# Altium PCB 19-3170105582.PcbDoc (part 2 of 2)
Units mil, origin at the board's own origin, x right, y up, seen from the top; angles counter-clockwise.
Board outline 8600 x 7000 mil, 2 copper layers (Top Layer, Bottom Layer); 186 components, 221 nets, 859 pads, 233 vias.
Unrouted connection lines stored in the file: 26.
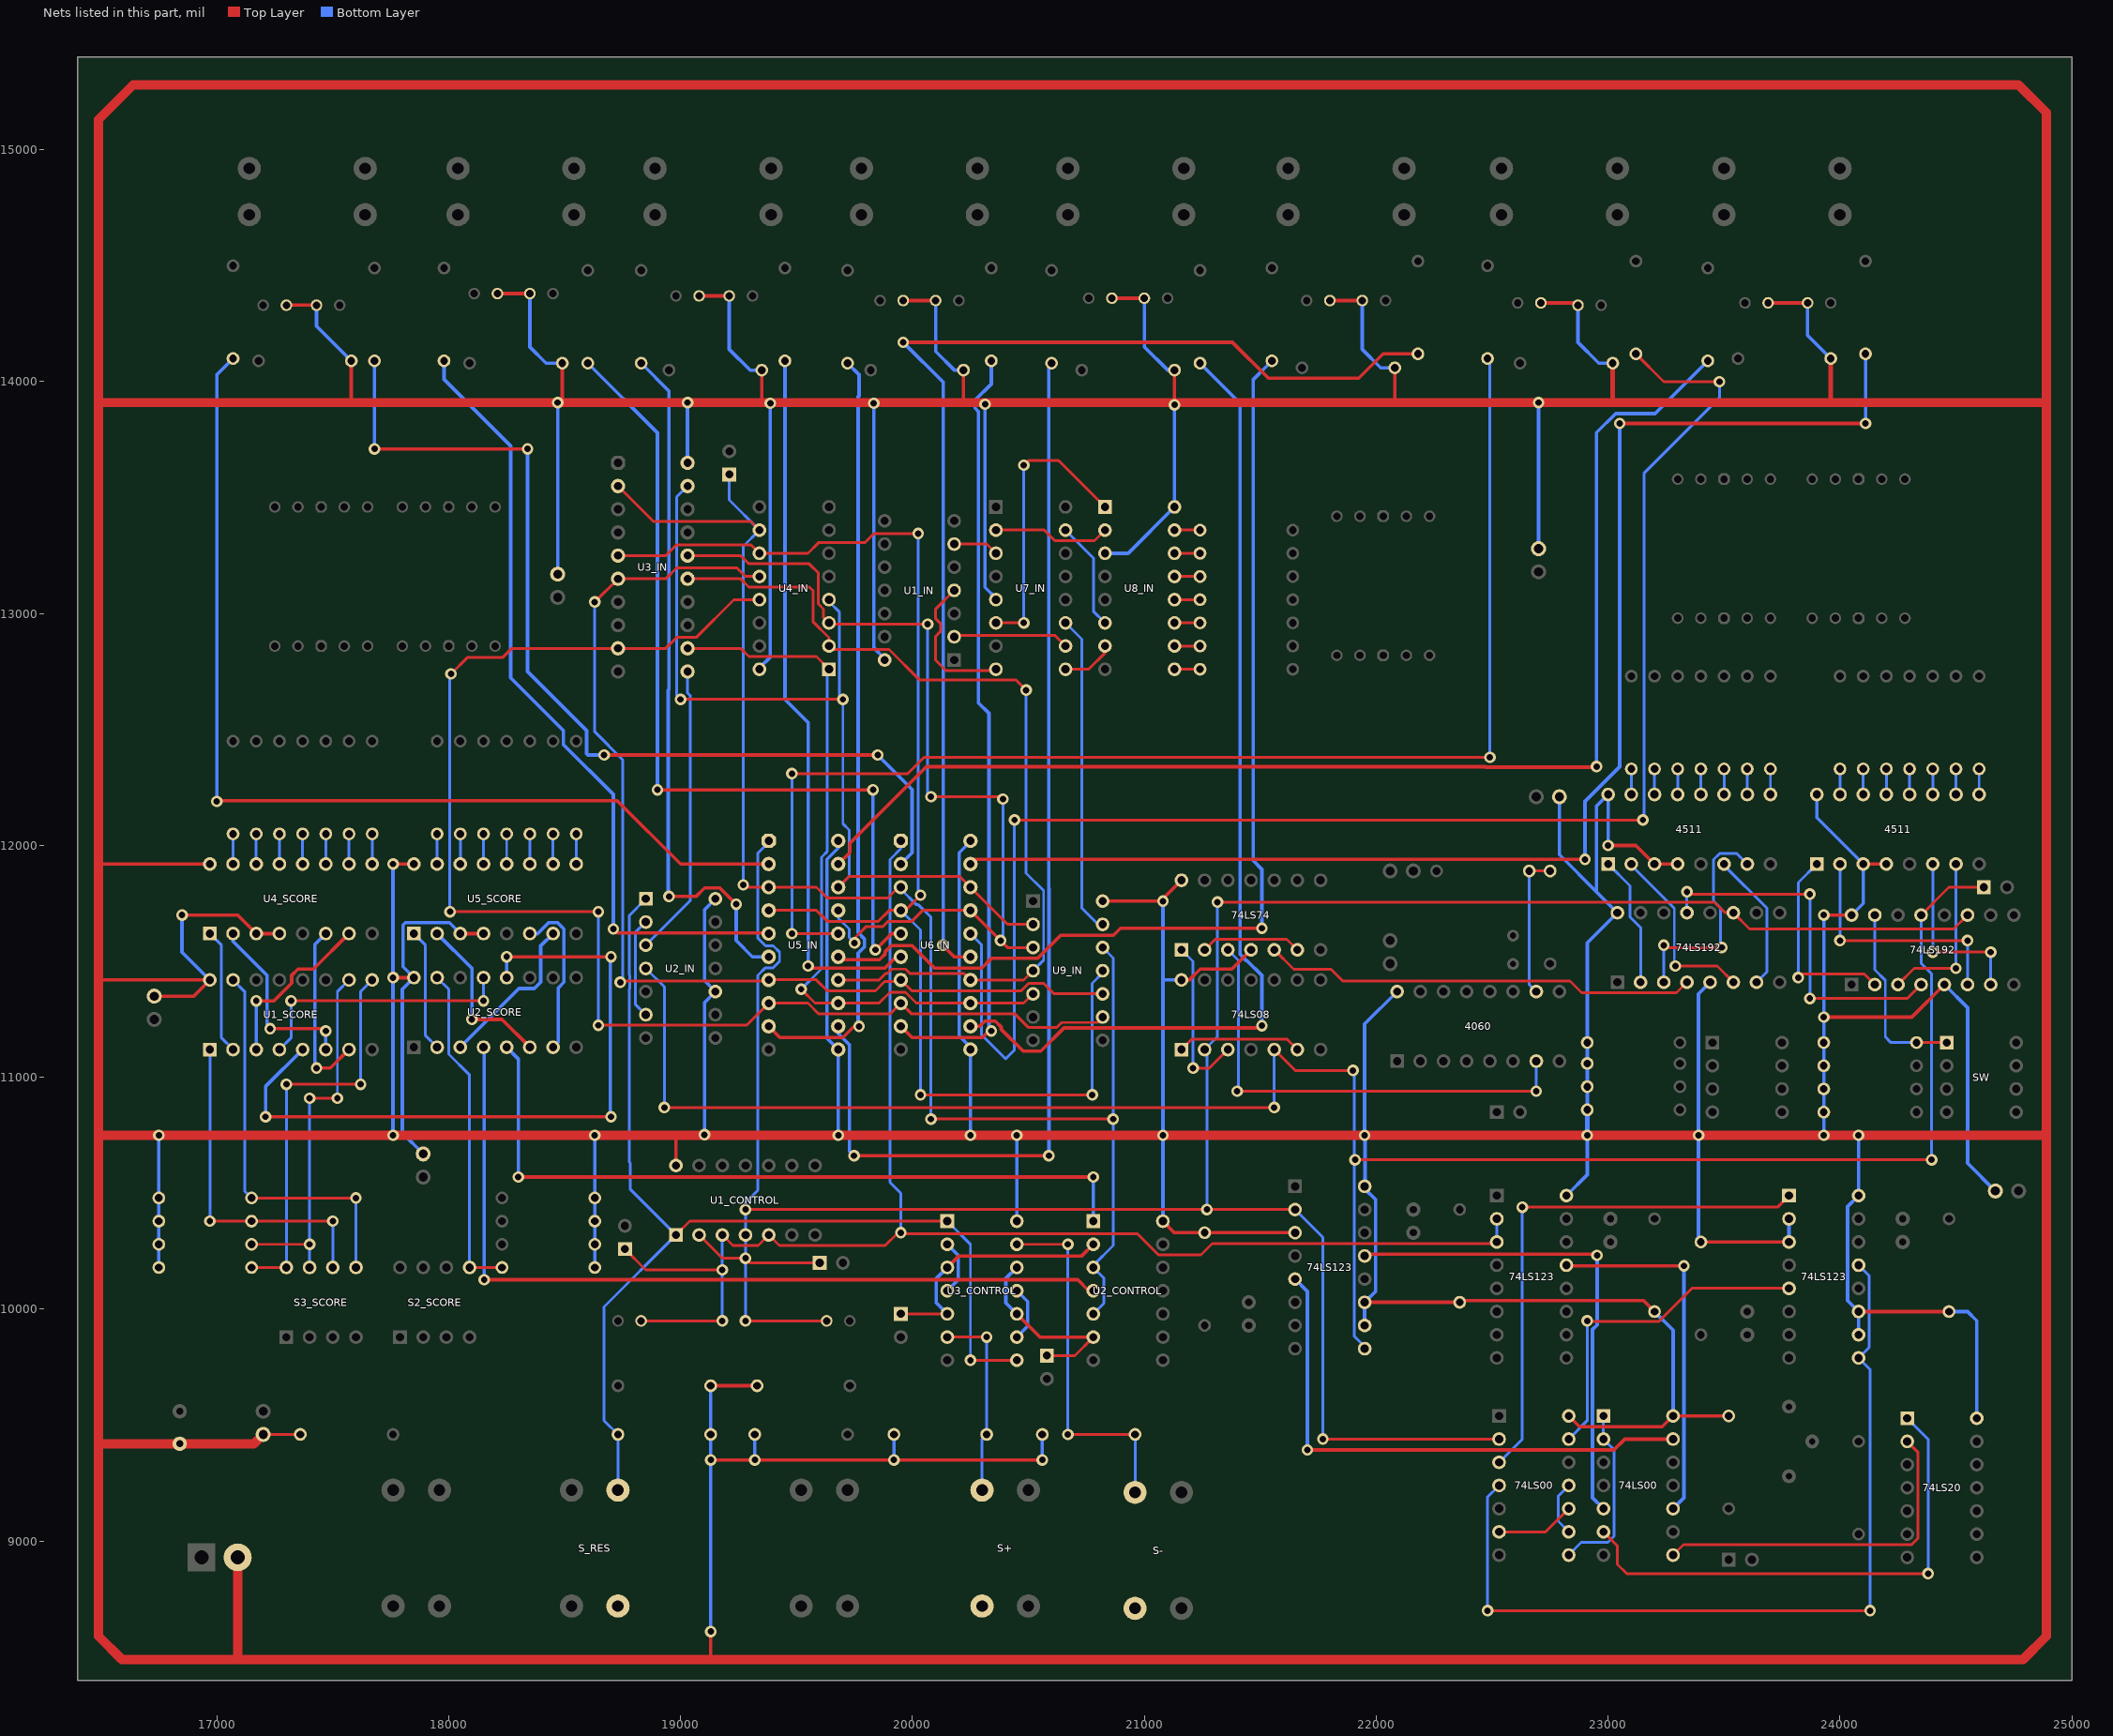
[diagram p2: the nets of this part, all layers, seen from the top]

## Via types
v1: diameter 50, hole 28, Top Layer to Bottom Layer, 233 vias

## Nets (pads, with @x,y where several pads share a name; then routed paths per layer and width w, separated by ;. In a path a pad name is that pad's centre, name@x,y a point inside that pad or via, vN(x,y) a via of type N, cw(c..) or ccw(c..) an arc to the next point about the centre after c; other vN are vias at no path point) (continued)
NetR8_SCORE_1: R8_SCORE.1 S2_SCORE.5 U2_SCORE.15 | length 1448
  Top Layer w12: S2_SCORE.5@18090,10180 R8_SCORE.1@18230,10180
  Bottom Layer w12: U2_SCORE.15@17950,11430 18000,11380 18000,11100 18090,11010 S2_SCORE.5@18090,10180
NetR8_TIME_1: 5.1K.1@24330,11150 74LS192.15@24150,11700 SW.1@24460,11150 | length 819
  Top Layer w12: 5.1K.1@24330,11150 SW.1@24460,11150
  Bottom Layer w12: 74LS192.15@24150,11700 24150,11464.39 24195.53,11418.86 24195.53,11284.47 24195.53,11174.47 24220,11150 5.1K.1@24330,11150
NetR9_IN_1: R9_IN.1 U8_IN.13 | length 110
  Top Layer w12: U8_IN.13@21130,13160 R9_IN.1@21240,13160
NetR9_SCORE_1: R9_SCORE.1 S3_SCORE.8 U1_SCORE.9 | length 1730.7
  Top Layer w12: R9_SCORE.1@17150,10180 S3_SCORE.8@17300,10180 ; v1(17300,10970) v1(17620,10970)
  Bottom Layer w12: S3_SCORE.8@17300,10180 v1(17300,10970) ; v1(17620,10970) 17620,11370 U1_SCORE.9@17670,11420
NetR9_TIME_1: 4511.13@24200,12220 R9_TIME.1 | length 110
  Bottom Layer w12: 4511.13@24200,12220 R9_TIME.1@24200,12330
NetR10_IN_1: R10_IN.1 U8_IN.12 | length 110
  Top Layer w12: U8_IN.12@21130,13060 R10_IN.1@21240,13060
NetR10_SCORE_1: R10_SCORE.1 S3_SCORE.7 U1_SCORE.10 | length 1630.7
  Top Layer w12: R10_SCORE.1@17150,10280 v1(17400,10280) ; v1(17400,10910) v1(17520,10910)
  Bottom Layer w12: S3_SCORE.7@17400,10180 v1(17400,10280) v1(17400,10910) ; v1(17520,10910) 17520,11370 U1_SCORE.10@17570,11420
NetR10_TIME_1: 4511.12@24300,12220 R10_TIME.1 | length 110
  Bottom Layer w12: 4511.12@24300,12220 R10_TIME.1@24300,12330
NetR11_IN_1: R11_IN.1 U8_IN.11 | length 110
  Top Layer w12: U8_IN.11@21130,12960 R11_IN.1@21240,12960
NetR11_SCORE_1: R11_SCORE.1 S3_SCORE.6 U1_SCORE.1 | length 1470
  Top Layer w12: v1(16970,10380) R11_SCORE.1@17150,10380 v1(17500,10380)
  Bottom Layer w12: v1(16970,10380) U1_SCORE.1@16970,11120 ; S3_SCORE.6@17500,10180 v1(17500,10380)
NetR11_TIME_1: 4511.11@24400,12220 R11_TIME.1 | length 110
  Bottom Layer w12: 4511.11@24400,12220 R11_TIME.1@24400,12330
NetR12_IN_1: R12_IN.1 U8_IN.10 | length 110
  Top Layer w12: U8_IN.10@21130,12860 R12_IN.1@21240,12860
NetR12_SCORE_1: 5.1k.1@17150,10480 S3_SCORE.5 U1_SCORE.15 | length 1723.1
  Top Layer w12: 5.1k.1@17150,10480 v1(17600,10480)
  Bottom Layer w12: U1_SCORE.15@17070,11420 17120,11370 17120,10510 5.1k.1@17150,10480 ; S3_SCORE.5@17600,10180 v1(17600,10480)
NetR12_TIME_1: 4511.10@24500,12220 R12_TIME.1 | length 110
  Bottom Layer w12: 4511.10@24500,12220 R12_TIME.1@24500,12330
NetR13_IN_1: R13_IN.1 U8_IN.9 | length 110
  Top Layer w12: U8_IN.9@21130,12760 R13_IN.1@21240,12760
NetR13_SCORE_1: R13_SCORE.1 U4_SCORE.13 | length 130
  Bottom Layer w12: U4_SCORE.13@17270,11920 R13_SCORE.1@17270,12050
NetR13_TIME_1: 4511.9@24600,12220 R13_TIME.1 | length 110
  Bottom Layer w12: 4511.9@24600,12220 R13_TIME.1@24600,12330
NetR14_IN_1: 1k.1@21240,13360 U8_IN.15 | length 110
  Top Layer w12: U8_IN.15@21130,13360 1k.1@21240,13360
NetR14_SCORE_1: R14_SCORE.1 U4_SCORE.12 | length 130
  Bottom Layer w12: U4_SCORE.12@17370,11920 R14_SCORE.1@17370,12050
NetR14_TIME_1: 1K.1@24000,12330 4511.15@24000,12220 | length 110
  Bottom Layer w12: 4511.15@24000,12220 1K.1@24000,12330
NetR15_IN_1: R15_IN.1 U8_IN.14 | length 110
  Top Layer w12: U8_IN.14@21130,13260 R15_IN.1@21240,13260
NetR15_SCORE_1: R15_SCORE.1 U4_SCORE.11 | length 130
  Bottom Layer w12: U4_SCORE.11@17470,11920 R15_SCORE.1@17470,12050
NetR15_TIME_1: 4511.14@24100,12220 R15_TIME.1 | length 110
  Bottom Layer w12: 4511.14@24100,12220 R15_TIME.1@24100,12330
NetR16_IN_1: 510.1@17070,14100 U5_IN.2 | length 4432.9
  Top Layer w15: v1(17000,12190) 17002.5,12192.5 18727.5,12192.5 19000,11920 U5_IN.2@19380,11920
  Bottom Layer w15: v1(17000,12190) 17000,14030 510.1@17070,14100
NetR16_SCORE_1: R16_SCORE.1 U4_SCORE.10 | length 130
  Bottom Layer w12: U4_SCORE.10@17570,11920 R16_SCORE.1@17570,12050
NetR16_TIME_1: 4511.13@23300,12220 R16_TIME.1 | length 110
  Bottom Layer w12: 4511.13@23300,12220 R16_TIME.1@23300,12330
NetR17_IN_1: R17_IN.1 U5_IN.5 | length 3430.7
  Top Layer w15: v1(18710,11640) 18727.03,11622.97 19377.03,11622.97 U5_IN.5@19380,11620
  Bottom Layer w15: R17_IN.1@17980,14090 17980,14009.9 18267.5,13722.4 18267.5,12722.62 18495.06,12495.06 18495.06,12434.94 18710,12220 v1(18710,11640)
NetR17_SCORE_1: R17_SCORE.1 U4_SCORE.9 | length 130
  Bottom Layer w12: U4_SCORE.9@17670,11920 R17_SCORE.1@17670,12050
NetR17_TIME_1: 4511.12@23400,12220 R17_TIME.1 | length 110
  Bottom Layer w12: 4511.12@23400,12220 R17_TIME.1@23400,12330
NetR18_IN_1: R18_IN.1 U5_IN.6 | length 3012.7
  Top Layer w15: v1(18950,11780) 19065.94,11780 19102.97,11817.03 19169.48,11817.03 v1(19240,11746.51)
  Bottom Layer w15: R18_IN.1@18830,14080 18950,13960 18950,12673.23 18946.5,12669.73 18946.5,11783.5 v1(18950,11780) ; v1(19240,11746.51) 19240,11590 19310,11520 U5_IN.6@19380,11520
NetR18_SCORE_1: 1k.1@17070,12050 U4_SCORE.15 | length 130
  Bottom Layer w12: U4_SCORE.15@17070,11920 1k.1@17070,12050
NetR18_TIME_1: 4511.11@23500,12220 R18_TIME.1 | length 110
  Bottom Layer w12: 4511.11@23500,12220 R18_TIME.1@23500,12330
NetR19_in_1: R19_in.1 U5_IN.9 | length 3337
  Top Layer w15: U5_IN.9@19380,11220 19428.5,11171.5 19700.09,11171.5 19748.59,11220 v1(19770,11220)
  Bottom Layer w15: R19_in.1@19720,14080 19770,14030 19770,13939.52 19765.47,13934.99 19765.47,11624.63 19792.5,11597.6 19792.5,11562.4 19765.47,11535.37 19765.47,11224.53 v1(19770,11220)
NetR19_SCORE_1: R19_SCORE.1 U4_SCORE.14 | length 130
  Bottom Layer w12: U4_SCORE.14@17170,11920 R19_SCORE.1@17170,12050
NetR19_TIME_1: 1K.1@23600,12330 4511.10@23600,12220 | length 110
  Bottom Layer w12: 4511.10@23600,12220 1K.1@23600,12330
NetR20_IN_1: R20_IN.1 U5_IN.12 | length 4850
  Top Layer w15: v1(19747.97,10662.03) v1(20587.97,10662.03)
  Bottom Layer w15: U5_IN.12@19680,11220 19680,11188.59 19728.5,11140.09 19728.5,10681.5 v1(19747.97,10662.03) ; v1(20587.97,10662.03) 20589.03,10663.08 20589.03,11815.26 20587.97,11816.32 20587.97,14067.97 R20_IN.1@20600,14080
NetR20_SCORE_1: R20_SCORE.1 U5_SCORE.13 | length 130
  Bottom Layer w12: U5_SCORE.13@18150,11920 R20_SCORE.1@18150,12050
NetR20_TIME_1: 4511.9@23700,12220 R20_TIME.1 | length 110
  Bottom Layer w12: 4511.9@23700,12220 R20_TIME.1@23700,12330
NetR21_IN_1: R21_IN.1 U5_IN.15 | length 4474.2
  Top Layer w15: U5_IN.15@19680,11530 19702.5,11507.5 19857.6,11507.5 19882.5,11532.4 19882.5,11542.4 19908.6,11568.5 19998.5,11568.5 20095.5,11471.5 20298.5,11471.5 20339.97,11512.97 20539.48,11512.97 20639.48,11612.97 20867.03,11612.97 20897.03,11642.97 v1(21507.03,11642.97)
  Bottom Layer w15: v1(21507.03,11642.97) 21507.03,11897.03 21470,11934.06 21470,14010 R21_IN.1@21550,14090
NetR21_SCORE_1: R21_SCORE.1 U5_SCORE.12 | length 130
  Bottom Layer w12: U5_SCORE.12@18250,11920 R21_SCORE.1@18250,12050
NetR21_TIME_1: 4511.15@23100,12220 R21_TIME.1 | length 110
  Bottom Layer w12: 4511.15@23100,12220 R21_TIME.1@23100,12330
NetR22_IN_1: R22_IN.1 U5_IN.16 | length 5653.1
  Top Layer w12: v1(19480,11620) U5_IN.16@19680,11620 ; v1(19480,12310) 19980,12310 20050,12380 v1(22490,12380)
  Bottom Layer w12: v1(19480,11620) v1(19480,12310) ; R22_IN.1@22480,14100 22490,14090 v1(22490,12380)
NetR22_SCORE_1: R22_SCORE.1 U5_SCORE.11 | length 130
  Bottom Layer w12: U5_SCORE.11@18350,11920 R22_SCORE.1@18350,12050
NetR22_TIME_1: 4511.14@23200,12220 R22_TIME.1 | length 110
  Bottom Layer w12: 4511.14@23200,12220 R22_TIME.1@23200,12330
NetR23_IN_1: R23_IN.1 U5_IN.19 | length 5517.9
  Top Layer w15: U5_IN.19@19680,11920 19730,11970 19730,12010 20060,12340 22469.9,12340 22472.4,12337.5 22947.5,12337.5 v1(22950,12340)
  Bottom Layer w15: v1(22950,12340) 22950,13780.1 23032.4,13862.5 23202.5,13862.5 R23_IN.1@23430,14090
NetR23_SCORE_1: R23_SCORE.1 U5_SCORE.10 | length 130
  Bottom Layer w12: U5_SCORE.10@18450,11920 R23_SCORE.1@18450,12050
NetR23_TIME_2: 12M.2 330K.1 4060.10 | length 622.4
  Top Layer w12: 330K.1@22660,11890 12M.2@22750,11890
  Bottom Layer w12: 330K.1@22660,11890 22660,11400 4060.10@22690,11370
NetR24_IN_1: 510.1@17680,14090 U6_IN.2 | length 4269.3
  Top Layer w15: v1(17680,13710) v1(18340,13710) ; v1(18670,12390) v1(19850,12390)
  Bottom Layer w15: v1(17680,13710) 510.1@17680,14090 ; v1(18340,13710) 18340,12830 18340,12750.12 18595.06,12495.06 18595.06,12394.94 18600,12390 v1(18670,12390) ; v1(19850,12390) 19998.5,12241.5 19998.5,11968.5 U6_IN.2@19950,11920
NetR24_SCORE_1: R24_SCORE.1 U5_SCORE.9 | length 130
  Bottom Layer w12: U5_SCORE.9@18550,11920 R24_SCORE.1@18550,12050
NetR25_IN_1: R25_IN.1 U6_IN.5 | length 3727.4
  Top Layer w15: v1(18900,12240) v1(19830,12240) ; v1(19840,11550) 19910,11620 U6_IN.5@19950,11620
  Bottom Layer w15: R25_IN.1@18600,14080 18900,13780 v1(18900,12240) ; v1(19830,12240) 19830,11560 v1(19840,11550)
NetR25_SCORE_1: 1k.1@17950,12050 U5_SCORE.15 | length 130
  Bottom Layer w12: U5_SCORE.15@17950,11920 1k.1@17950,12050
NetR26_IN_1: R26_IN.1 U6_IN.6 | length 3075
  Top Layer w15: v1(19550,11480) 19558.5,11471.5 19881.5,11471.5 19930,11520 U6_IN.6@19950,11520
  Bottom Layer w15: R26_IN.1@19450,14090 19450,12629.9 19550,12529.9 v1(19550,11480)
NetR26_SCORE_1: R26_SCORE.1 U5_SCORE.14 | length 130
  Bottom Layer w12: U5_SCORE.14@18050,11920 R26_SCORE.1@18050,12050
NetR27_IN_1: R27_IN.1 U6_IN.9 | length 3375.4
  Top Layer w15: U6_IN.9@19950,11220 19998.5,11171.5 20301.5,11171.5 20330,11200 v1(20340,11200)
  Bottom Layer w15: v1(20340,11200) 20330,11200 20330,12569.9 20284.87,12615.03 20284.87,13870.97 20270.47,13885.37 20270.47,13920.58 20340,13990.1 R27_IN.1@20340,14090
NetR28_IN_1: R28_IN.1 U6_IN.12 | length 4340.8
  Top Layer w15: U6_IN.12@20250,11220 20289.9,11220 20312.4,11242.5 20357.6,11242.5 20382.5,11217.6 20382.5,11207.6 20477.13,11112.97 20552.97,11112.97 20652.97,11212.97 21497.03,11212.97 v1(21507.03,11222.97)
  Bottom Layer w15: R28_IN.1@21240,14080 21412.97,13907.03 21412.97,11530.52 21440.52,11502.97 21443.53,11502.97 21507.03,11439.48 v1(21507.03,11222.97)
NetR29_IN_1: R29_IN.1 U6_IN.15 | length 5140.9
  Top Layer w15: v1(19960,14170) 21379.88,14170 21534.94,14014.94 21924.94,14014.94 22030,14120 R29_IN.1@22180,14120 ; v1(20130,11570) 20180,11520 U6_IN.15@20250,11520
  Bottom Layer w15: v1(19960,14170) 20132.5,13997.5 20132.5,11572.5 v1(20130,11570)
NetR30_IN_1: R30_IN.1 U6_IN.16 | length 6795.1
  Top Layer w12: v1(20440,12110) v1(23150,12110) ; R30_IN.1@23120,14120 23240,14000 v1(23480,14000)
  Bottom Layer w12: U6_IN.16@20250,11620 20297,11573 20297,11185.02 20402.02,11080 20440,11117.98 v1(20440,12110) ; v1(23150,12110) 23154.47,12114.47 23154.47,13604.47 23480,13930 v1(23480,14000)
NetR31_IN_1: R31_IN.1 U6_IN.19 | length 5960.4
  Top Layer w15: U6_IN.19@20250,11920 20270,11940 v1(22900,11940) ; v1(23050,13820) v1(24110,13820)
  Bottom Layer w15: v1(22900,11940) 22900,12190 23050,12340 v1(23050,13820) ; v1(24110,13820) R31_IN.1@24110,14120
NetU1_ALARM_3: 74LS00.3@22530,9340 74LS123.1@23780,10490 | length 2312.1
  Top Layer w12: v1(22630,10440) 23730,10440 74LS123.1@23780,10490
  Bottom Layer w12: 74LS00.3@22530,9340 22630,9440 v1(22630,10440)
NetU1_ALARM_4: 74LS00.4@22530,9240 74LS123.9@24080,9790 74LS123.13@24080,10190 | length 3759.1
  Top Layer w12: v1(22480,8700) v1(24130,8700)
  Bottom Layer w12: v1(22480,8700) 22480,9190 74LS00.4@22530,9240 ; 74LS123.13@24080,10190 24125.53,10144.47 24125.53,9835.53 74LS123.9@24080,9790 24130,9740 v1(24130,8700)
NetU1_ALARM_6: 74LS00.6@22530,9040 74LS00.10@22830,9140 | length 341.4
  Top Layer w12: 74LS00.6@22530,9040 22730,9040 74LS00.10@22830,9140
NetU1_ALARM_8: 74LS00.1@22980,9540 74LS00.2@22980,9440 74LS00.8@22830,8940 | length 766.9
  Bottom Layer w12: 74LS00.8@22830,8940 22884.47,8994.47 22998.86,8994.47 23025.53,9021.14 23025.53,9394.47 74LS00.2@22980,9440 74LS00.1@22980,9540
NetU1_ALARM_9: 74LS00.9@22830,9040 74LS00.11@22830,9240 | length 237.7
  Bottom Layer w12: 74LS00.9@22830,9040 22784.47,9085.53 22784.47,9194.47 74LS00.11@22830,9240
NetU1_ALARM_13: 74LS00.13@22830,9440 74LS123.5@23780,10090 | length 1474.1
  Top Layer w12: v1(22910,9950) 22913.56,9946.44 23218.04,9946.44 23361.6,10090 74LS123.5@23780,10090
  Bottom Layer w12: 74LS00.13@22830,9440 22909.47,9519.47 22909.47,9949.47 v1(22910,9950)
NetU1_IN_2: U1_IN.2 U7_IN.10 | length 501.1
  Top Layer w12: U1_IN.2@20180,12900 20185.53,12905.53 20614.47,12905.53 U7_IN.10@20660,12860
NetU1_IN_4: U1_IN.4 U7_IN.8 | length 632.7
  Top Layer w12: U1_IN.4@20180,13100 20100,13020 20100,12977.98 20121,12956.98 20121,12923.02 20100,12902.02 20100,12798.32 20143.85,12754.47 20354.47,12754.47 U7_IN.8@20360,12760
NetU1_IN_6: U1_IN.6 U7_IN.3 | length 196.6
  Top Layer w12: U1_IN.6@20180,13300 20320,13300 U7_IN.3@20360,13260
NetU1_SCORE_2: U1_SCORE.2 U4_SCORE.1 | length 541.4
  Bottom Layer w12: U4_SCORE.1@16970,11620 17020,11570 17020,11170 U1_SCORE.2@17070,11120
NetU1_SCORE_3: U1_SCORE.3 U4_SCORE.7 | length 749.5
  Top Layer w15: v1(17170,11330) 17246.51,11330 17322.97,11406.47 17322.97,11439.48 17350.52,11467.03 17417.03,11467.03 U4_SCORE.7@17570,11620
  Bottom Layer w15: U1_SCORE.3@17170,11120 v1(17170,11330)
NetU1_SCORE_6: U1_SCORE.6 U4_SCORE.2 | length 810.4
  Top Layer w15: v1(17230,11210) 17460,11210 v1(17470,11200)
  Bottom Layer w15: U4_SCORE.2@17070,11620 17070,11586.51 17217.03,11439.48 17217.03,11222.97 v1(17230,11210) ; U1_SCORE.6@17470,11120 v1@17470,11210
NetU1_SCORE_7: U1_SCORE.7 U4_SCORE.6 | length 775.5
  Top Layer w15: v1(17430,11040) 17490,11040 U1_SCORE.7@17570,11120
  Bottom Layer w15: v1(17430,11040) 17422.97,11047.03 17422.97,11572.97 U4_SCORE.6@17470,11620
NetU1_TIME_2: 74LS192.2@24150,11400 4511.1@23900,11920 | length 878.4
  Top Layer w12: v1(23820,11430) 23835.53,11445.53 23865.53,11445.53 24104.47,11445.53 74LS192.2@24150,11400
  Bottom Layer w12: v1(23820,11430) 23820,11840 4511.1@23900,11920
NetU1_TIME_3: 74LS192.3@24250,11400 4511.7@24500,11920 | length 729
  Top Layer w12: 74LS192.3@24250,11400 24320,11470 v1(24500,11470)
  Bottom Layer w12: v1(24500,11470) 24500,11650 4511.7@24500,11920
NetU1_TIME_4: 74LS192.4@24350,11400 74LS192.13@23340,11710 | length 1584.9
  Top Layer w12: v1(23340,11800) 23340,11790 v1(23870,11790) ; v1(23870,11340) 24290,11340 74LS192.4@24350,11400
  Bottom Layer w12: 74LS192.13@23340,11710 v1(23340,11800) ; v1(23870,11340) v1(23870,11790)
NetU1_TIME_6: 74LS192.6@24550,11400 4511.2@24000,11920 | length 1070
  Top Layer w12: v1(24000,11590) v1(24550,11590)
  Bottom Layer w12: v1(24000,11590) 4511.2@24000,11920 ; 74LS192.6@24550,11400 v1(24550,11590)
NetU1_TIME_7: 74LS192.7@24650,11400 4511.6@24400,11920 | length 770
  Top Layer w12: v1(24400,11540) v1(24650,11540)
  Bottom Layer w12: v1(24400,11540) 4511.6@24400,11920 ; 74LS192.7@24650,11400 v1(24650,11540)
NetU2_ALARM_5: 74LS00.5@22980,9140 74LS123.13@21950,10230 | length 2127.4
  Top Layer w15: 74LS123.13@21950,10230 21957.03,10237.03 22947.97,10237.03 v1(22952.5,10232.5)
  Bottom Layer w15: v1(22952.5,10232.5) 22952.5,9932.4 22932.97,9912.87 22932.97,9187.03 74LS00.5@22980,9140
NetU2_ALARM_6: 74LS00.6@22980,9040 74LS20.1 | length 2228.7
  Top Layer w12: 74LS00.6@22980,9040 23040,8980 23040,8900 23080,8860 23160,8860 v1(24380,8860)
  Bottom Layer w12: 74LS20.1@24290,9530 24380,9440 v1(24380,8860)
NetU2_ALARM_8: 74LS00.8@23280,8940 74LS20.2 | length 1522.7
  Top Layer w12: 74LS00.8@23280,8940 23324.47,8984.47 24308.86,8984.47 24335.53,9011.14 24335.53,9384.47 74LS20.2@24290,9430
NetU2_ALARM_10: 74LS00.10@23280,9140 74LS123.13@22820,10190 | length 1574.8
  Top Layer w15: 74LS123.13@22820,10190 22822.97,10187.03 v1(23327.03,10187.03)
  Bottom Layer w15: 74LS00.10@23280,9140 23327.03,9187.03 v1(23327.03,10187.03)
NetU2_ALARM_13: 74LS00.13@23280,9440 74LS123.5@21650,10130 | length 2355.5
  Top Layer w15: v1(21702.97,9392.97) 21722.97,9392.97 23024.74,9392.97 23071.77,9440 74LS00.13@23280,9440
  Bottom Layer w15: 74LS123.5@21650,10130 21702.97,10077.03 v1(21702.97,9392.97)
NetU2_IN_2: U2_IN.2 U2_IN.6 | length 437.7
  Bottom Layer w12: U2_IN.6@18850,11270 18804.47,11315.53 18804.47,11624.47 U2_IN.2@18850,11670
NetU2_IN_3: U2_IN.3 U3_IN.11 | length 1263.7
  Bottom Layer w12: U2_IN.3@18850,11570 19041,11761 19041,12646.98 19030,12657.98 U3_IN.11@19030,12750
NetU2_SCORE_2: U2_SCORE.2 U5_SCORE.1 | length 531.4
  Bottom Layer w12: U5_SCORE.1@17850,11620 17900,11570 17900,11180 U2_SCORE.2@17950,11130
NetU2_SCORE_3: U2_SCORE.3 U5_SCORE.7 | length 694.6
  Bottom Layer w15: U2_SCORE.3@18050,11130 18302.97,11382.97 18369.48,11382.97 18397.03,11410.52 18397.03,11567.03 U5_SCORE.7@18450,11620
NetU2_SCORE_6: U2_SCORE.6 U5_SCORE.2 | length 731.8
  Top Layer w15: v1(18100,11250) 18230,11250 U2_SCORE.6@18350,11130
  Bottom Layer w15: U5_SCORE.2@17950,11620 18100,11470 v1(18100,11250)
NetU2_SCORE_7: U2_SCORE.7 U5_SCORE.6 | length 706.9
  Bottom Layer w15: U5_SCORE.6@18350,11620 18383.49,11620 18430.52,11667.03 18469.48,11667.03 18497.03,11639.48 18497.03,11410.26 18472.03,11385.26 18472.03,11152.03 U2_SCORE.7@18450,11130
NetU3_CONTROL_2: U3_CONTROL.2 U3_CONTROL.4 | length 239
  Bottom Layer w15: U3_CONTROL.4@20150,10080 20197.03,10127.03 20197.03,10232.97 U3_CONTROL.2@20150,10280
NetU3_CONTROL_9: U3_CONTROL.9 U3_CONTROL.11 | length 239
  Bottom Layer w15: U3_CONTROL.9@20450,9880 20497.03,9927.03 20497.03,10032.97 U3_CONTROL.11@20450,10080
NetU3_IN_5: U3_IN.5 U4_IN.11 U5_IN.4 U6_IN.4 U9_IN.11 | length 5781.6
  Top Layer w12: U3_IN.5@18730,13250 18936,13250 18983,13297 19303,13297 U4_IN.11@19340,13260 19548.94,13260 19594.47,13305.53 19794.47,13305.53 19834.47,13345.53 v1(20024.47,13345.53) ; U5_IN.4@19380,11720 19586,11720 19633,11673 19853,11673 19900,11720 U6_IN.4@19950,11720 19968.94,11720 v1(20034.47,11785.53) ; v1(20034.47,10924.47) v1(20775.53,10924.47)
  Bottom Layer w12: U6_IN.4@19950,11720 20034.47,11635.53 v1(20034.47,10924.47) ; v1(20024.47,13345.53) 20024.47,11785.53 v1(20034.47,11785.53) ; v1(20775.53,10924.47) 20774.47,10925.53 20774.47,11405.53 20820,11451.06 U9_IN.11@20820,11460
NetU3_IN_6: U3_IN.6 U4_IN.12 U5_IN.7 U6_IN.7 U9_IN.10 | length 4656.6
  Top Layer w12: v1(18630,13050) U3_IN.6@18730,13150 18936,13150 18983,13197 19243.06,13197 19280.06,13160 U4_IN.12@19340,13160 ; v1(18740,11410) 18745.53,11415.53 19375.53,11415.53 U5_IN.7@19380,11420 19381,11421 19585,11421 19633,11373 19840.11,11373 19880.39,11413.28 19943.28,11413.28 U6_IN.7@19950,11420 19997,11373 20468.61,11373 20501.14,11405.53 20565.53,11405.53 20611.06,11360 U9_IN.10@20820,11360
  Bottom Layer w12: v1(18630,13050) 18630,12490 18751,12369 18751,11421 v1(18740,11410)
NetU3_IN_9: U3_IN.9 U4_IN.13 U5_IN.8 U6_IN.8 U9_IN.9 | length 5937
  Top Layer w12: v1(18005.53,11714.47) v1(18645.53,11714.47) ; v1(18010,12740) 18080,12810 18232,12810 18272,12850 U3_IN.9@18730,12850 18936,12850 18983,12897 19067,12897 19230,13060 U4_IN.13@19340,13060 ; v1(18645.53,11224.47) 19284.47,11224.47 U5_IN.8@19380,11320 19548.89,11320 19595.89,11273 19903,11273 U6_IN.8@19950,11320 19997,11273 20442.61,11273 20501.14,11214.47 20621.24,11214.47 20643.24,11236.47 20796.47,11236.47 U9_IN.9@20820,11260
  Bottom Layer w12: v1(18005.53,11714.47) 18004.47,11714.47 18004.47,12734.47 v1(18010,12740) ; v1(18645.53,11224.47) v1(18645.53,11714.47)
NetU3_IN_12: U3_IN.12 U4_IN.1 U5_IN.13 U6_IN.13 U9_IN.5 | length 3157.3
  Top Layer w12: U3_IN.12@19030,12850 19258.94,12850 19294.47,12814.47 19585.53,12814.47 U4_IN.1@19640,12760 ; v1(19520,11380) 19580,11320 U5_IN.13@19680,11320 19856,11320 19903,11367 19969.47,11367 20016.47,11320 U6_IN.13@20250,11320 20480,11320 U9_IN.5@20520,11360
  Bottom Layer w12: v1(19520,11380) 19608,11468 19608,11949.82 19633,11974.82 19633,12753 U4_IN.1@19640,12760
NetU3_IN_15: U3_IN.15 U4_IN.2 U5_IN.14 U6_IN.14 U9_IN.4 | length 3914.1
  Top Layer w12: U3_IN.15@19030,13150 19258.94,13150 19294.47,13114.47 19555.53,13114.47 19572.47,13097.53 19572.47,12963.14 19640,12895.61 U4_IN.2@19640,12860 19654.47,12845.53 19898.86,12845.53 20029.91,12714.47 20445.53,12714.47 v1(20490,12670) ; U5_IN.14@19680,11420 19856,11420 19884,11448 19891.23,11448 19910.23,11467 19969.77,11467 19988.77,11448 20222,11448 U6_IN.14@20250,11420 20480,11420 U9_IN.4@20520,11460
  Bottom Layer w12: v1(20490,12670) 20490,11881.06 20565.53,11805.53 20565.53,11505.53 U9_IN.4@20520,11460
NetU3_IN_16: U3_IN.16 U4_IN.3 U5_IN.17 U6_IN.17 U9_IN.3 | length 4051
  Top Layer w12: U3_IN.16@19030,13250 19258.94,13250 19294.47,13214.47 19554.47,13214.47 19594.47,13174.47 19594.47,13041.14 19616.47,13019.14 19616.47,12983.53 U4_IN.3@19640,12960 19645.53,12954.47 v1(20065.53,12954.47) ; v1(19750,11580) 19750,11600 19801,11651 19873.02,11651 19895.02,11673 19997,11673 20044,11720 U6_IN.17@20250,11720 20410,11560 U9_IN.3@20520,11560 ; v1(20080,12210) 20380,12210 v1(20390,12200)
  Bottom Layer w12: U5_IN.17@19680,11720 19680,11686.47 19727,11639.47 19727,11603 v1(19750,11580) ; v1(20080,12210) 20065.53,12224.47 v1(20065.53,12954.47) v1@20080,12940 ; v1(20380.07,11589.93) 20390,11580 v1(20390,12200)
NetU3_IN_19: U3_IN.19 U4_IN.4 U5_IN.18 U6_IN.18 U9_IN.2 | length 3887.2
  Top Layer w12: v1(19000,12630) v1(19700,12630) ; U5_IN.18@19680,11820 19727,11867 20203,11867 U6_IN.18@20250,11820 20410,11660 U9_IN.2@20520,11660
  Bottom Layer w12: v1(19000,12630) 18983,12647 18983,13503 U3_IN.19@19030,13550 ; U4_IN.4@19640,13060 19640,13051.06 19685.53,13005.53 19685.53,12644.47 v1(19700,12630) 19700,12093.47 19727,12066.47 19727,11867 U5_IN.18@19680,11820
NetU3_TIME_2: 74LS192.2@23140,11410 4511.1@23000,11920 | length 568
  Bottom Layer w12: 4511.1@23000,11920 23094.47,11825.53 23094.47,11691.14 23140,11645.61 74LS192.2@23140,11410
NetU3_TIME_3: 74LS192.3@23240,11410 4511.7@23600,11920 | length 983.1
  Top Layer w12: v1(23240,11570) 23250,11560 v1(23490,11560)
  Bottom Layer w12: 74LS192.3@23240,11410 v1(23240,11570) ; v1(23490,11560) 23485.53,11564.47 23485.53,11728.86 23454.47,11759.91 23454.47,11938.86 23481.14,11965.53 23554.47,11965.53 4511.7@23600,11920
NetU3_TIME_4: 74LS74.5 74LS192.4@23340,11410 | length 1875.7
  Top Layer w12: 74LS74.5@21560,11550 21644.47,11465.53 21805.53,11465.53 21855.53,11415.53 22835.53,11415.53 22886.58,11364.47 23294.47,11364.47 74LS192.4@23340,11410
NetU3_TIME_6: 74LS192.6@23540,11410 4511.2@23100,11920 | length 797.7
  Top Layer w12: v1(23290,11480) 23310,11480 23470,11480 74LS192.6@23540,11410
  Bottom Layer w12: 4511.2@23100,11920 23100,11914.39 23285.53,11728.86 23285.53,11484.47 v1(23290,11480)
NetU3_TIME_7: 74LS192.7@23640,11410 4511.6@23500,11920 | length 605.7
  Bottom Layer w12: 4511.6@23500,11920 23500,11914.39 23685.53,11728.86 23685.53,11455.53 74LS192.7@23640,11410
NetU5_TIME_7: 74LS74.3 4060.7 | length 2051.1
  Top Layer w12: v1(21400,10940) v1(22690,10940)
  Bottom Layer w12: 74LS74.3@21360,11550 21405.53,11504.47 21405.53,10945.53 v1(21400,10940) ; v1(22690,10940) 4060.7@22690,11070
NetU6_TIME_1: 74LS08.1 74LS08.6 | length 537.7
  Top Layer w12: 74LS08.1@21160,11120 21205.53,11165.53 21614.47,11165.53 74LS08.6@21660,11120
NetU6_TIME_3: 74LS08.3 74LS74.1 | length 713.8
  Top Layer w12: v1(21210,11040) 21280,11040 74LS08.3@21360,11120
  Bottom Layer w12: 74LS74.1@21160,11550 21210,11500 v1(21210,11040)
NetU7_IN_2: U7_IN.2 U8_IN.2 | length 507.7
  Top Layer w12: U7_IN.2@20360,13360 20568.94,13360 20614.47,13314.47 20784.47,13314.47 U8_IN.2@20830,13360
NetU7_IN_6: U7_IN.6 U8_IN.1 | length 1269.4
  Top Layer w12: U7_IN.6@20360,12960 v1(20480,12960) ; U8_IN.1@20830,13460 20630,13660 20500,13660 ; 20500,13660 v1(20480,13640) 20500,13660
  Bottom Layer w12: v1(20480,12960) v1(20480,13640)
NetU7_IN_9: U7_IN.9 U8_IN.7 | length 229
  Top Layer w12: U7_IN.9@20660,12760 20760,12760 20830,12830 U8_IN.7@20830,12860
NetU7_IN_11: U7_IN.11 U9_IN.13 | length 1378
  Bottom Layer w12: U7_IN.11@20660,12960 20730,12890 20730,11730 20800,11660 U9_IN.13@20820,11660
NetU7_IN_15: U7_IN.15 U8_IN.6 | length 470.4
  Bottom Layer w12: U7_IN.15@20660,13360 20780,13240 20780,13010 U8_IN.6@20830,12960
NetU7_TIME_2: 74LS74.2 74LS74.6 | length 437.7
  Top Layer w12: 74LS74.2@21260,11550 21305.53,11595.53 21614.47,11595.53 74LS74.6@21660,11550
PLUS: U2_CONTROL.1 U2_SCORE.5 | length 3250.7
  Top Layer w15: v1(18300,10570) v1(20780,10570)
  Bottom Layer w15: U2_SCORE.5@18250,11130 18300,11080 v1(18300,10570) ; U2_CONTROL.1@20780,10380 v1(20780,10570)
Q0: Q0.1 U2_CONTROL.3 U2_CONTROL.5 U3_IN.2 U4_IN.10 U5_IN.3 U6_IN.3 U9_IN.12 | length 6780.7
  Top Layer w12: U3_IN.2@18730,13550 18883,13397 19303,13397 U4_IN.10@19340,13360 ; v1(19270,11830) 19280,11820 U5_IN.3@19380,11820 19586,11820 19633,11773 19893,11773 19940,11820 U6_IN.3@19950,11820 ; v1(20080,10820) v1(20865.53,10820)
  Bottom Layer w12: Q0.1@19210,13600 19210,13490 U4_IN.10@19340,13360 19270,13290 v1(19270,11830) ; U6_IN.3@19950,11820 19950,11812.02 20017.49,11744.53 20025.47,11744.53 20080,11690 v1(20080,10820) ; U2_CONTROL.5@20780,9980 20825.53,10025.53 20825.53,10134.47 U2_CONTROL.3@20780,10180 20780,10188.94 20865.53,10274.47 20865.53,11514.47 U9_IN.12@20820,11560
RES1: 5.1k.2@18730,9460 S_RES.2 U1_CONTROL.1 U2_IN.1 U3_CONTROL.1 U3_CONTROL.8 | length 4868.9
  Top Layer w12: U1_CONTROL.1@18980,10320 19040,10380 U3_CONTROL.1@20150,10380 ; v1(20250,9780) U3_CONTROL.8@20450,9780
  Bottom Layer w12: S_RES.2@18730,9220 5.1k.2@18730,9460 18670,9520 18670,10010 U1_CONTROL.1@18980,10320 18783.5,10516.5 18783.5,10629.73 18778.47,10634.76 18778.47,11380.49 18781,11383.02 18781,11438.98 18778.47,11441.51 18778.47,11697.53 U2_IN.1@18850,11769.06 ; U3_CONTROL.1@20150,10380 20250,10280 v1(20250,9780)
  Bottom Layer w20: S_RES.2@18725,8725 S_RES.2@18730,8720 ; S_RES.2@18725,9215 S_RES.2@18730,9220 ; U2_IN.1@18850,11769.06 U2_IN.1@18850,11770
RES2: 74LS123.2@22520,10390 74LS123.3@22520,10290 GRE.2@18830,9950 RES2.1 U1_CONTROL.3 U1_CONTROL.5 U6_IN.1 | length 6484.7
  Top Layer w12: RES2.1@18760,10260 18850,10170 v1(19180,10170) ; GRE.2@18830,9950 v1(19180,9950) ; U1_CONTROL.3@19180,10320 19225.53,10274.47 19334.47,10274.47 U1_CONTROL.5@19380,10320 19425.53,10274.47 19882.46,10274.47 19933.51,10325.53 20970.09,10325.53 21061.14,10234.47 21244.47,10234.47 21293,10283 22513,10283 74LS123.3@22520,10290
  Bottom Layer w12: v1(19180,9950) U1_CONTROL.3@19180,10320 ; v1(19950,10330) 19950,10500 19903,10547 19903,11939.47 19950,11986.47 U6_IN.1@19950,12020 ; 74LS123.3@22520,10290 74LS123.2@22520,10390
S+: 5.1k.2@20320,9460 S+.1 U3_CONTROL.6 | length 909
  Top Layer w12: U3_CONTROL.6@20150,9880 v1(20320,9880)
  Bottom Layer w12: S+.1@20320,9240 S+.1@20300,9220 20300,9440 5.1k.2@20320,9460 v1(20320,9880)
  Bottom Layer w20: S+.1@20300,8720 S+.1@20305,8725 ; S+.1@20305,9215 S+.1@20300,9220 S+.1@20320,9240
S++: S++.1 U2_CONTROL.2 U3_CONTROL.3 U3_CONTROL.5 | length 1110.4
  Top Layer w12: S++.1@19950,9980 U3_CONTROL.5@20150,9980
  Top Layer w15: U3_CONTROL.3@20150,10180 20200,10230 20730,10230 U2_CONTROL.2@20780,10280
  Bottom Layer w15: U3_CONTROL.5@20150,9980 20102.97,10027.03 20102.97,10132.97 U3_CONTROL.3@20150,10180
S-: 5.1k.2@20960,9460 S-.1 U3_CONTROL.13 | length 1594.1
  Top Layer w12: U3_CONTROL.13@20450,10280 v1(20670,10280) ; v1(20670,9460) 20730,9460 5.1k.2@20960,9460
  Bottom Layer w12: v1(20670,9460) v1(20670,10280) ; S-.1@20960,9210 5.1k.2@20960,9460
  Bottom Layer w20: S-.1@20960,8710 S-.1@20965,8715 ; S-.1@20960,9210 S-.1@20965,9205
S--: S--.1 U2_CONTROL.6 U3_CONTROL.10 U3_CONTROL.12 | length 843.5
  Top Layer w12: S--.1@20580,9800 20700,9800 U2_CONTROL.6@20780,9880
  Top Layer w15: U3_CONTROL.10@20450,9980 20550,9880 U2_CONTROL.6@20780,9880
  Bottom Layer w15: U3_CONTROL.10@20450,9980 20402.97,10027.03 20402.97,10132.97 U3_CONTROL.12@20450,10180
SATA: 74LS00.2@22530,9440 74LS08.2 74LS123.2@21650,10430 74LS192.11 RED.2@19630,9950 SATA.1 U1_CONTROL.2 U1_CONTROL.4 U5_IN.1 | length 11977.1
  Top Layer w12: U1_CONTROL.2@19080,10320 19180,10220 v1(19280,10220) 19300,10200 SATA.1@19600,10200 ; v1(19280,9950) RED.2@19630,9950 ; v1(19280,10430) v1(21270,10430) 74LS123.2@21650,10430 ; v1(21315.53,11755.53) 23458.86,11755.53 23504.39,11710 74LS192.11@23540,11710 23610,11640 24490,11640 74LS192.11@24550,11700 ; v1(21770,9440) 74LS00.2@22530,9440
  Bottom Layer w12: v1(19280,9950) U1_CONTROL.4@19280,10320 v1(19280,10430) 19280,10460 19333,10513 19333,11439.47 19366.53,11473 19399.47,11473 19427,11500.53 19427,11539.47 19399.47,11567 19366.53,11567 19333,11600.53 19333,11967 19380,12014 U5_IN.1@19380,12020 ; v1(21270,10430) 21270,11110 74LS08.2@21260,11120 21314.47,11174.47 21314.47,11754.47 v1(21315.53,11755.53) ; 74LS123.2@21650,10430 21770,10310 21770,10280.04 v1(21770,9440)
SUBTRACT: U2_CONTROL.4 U2_SCORE.4 | length 3650.7
  Top Layer w15: v1(18152.97,10127.03) 20712.97,10127.03 20760,10080 U2_CONTROL.4@20780,10080
  Bottom Layer w15: U2_SCORE.4@18150,11130 18152.97,11127.03 v1(18152.97,10127.03)
TCD1_COUNT: U1_SCORE.4 U2_SCORE.13 | length 1160.7
  Top Layer w12: v1(17320,11330) v1(18150,11330)
  Bottom Layer w12: U1_SCORE.4@17270,11120 17320,11170 v1(17320,11330) ; v1(18150,11330) U2_SCORE.13@18150,11430
TCD2: 74LS08.5 74LS123.9@21950,9830 74LS192.13@24350,11700 TCD2.1 U2_IN.4 | length 8998.1
  Top Layer w12: v1(18930,10870) v1(21560,10870) ; 74LS08.5@21560,11120 21650,11030 v1(21900,11030) ; v1(21908.94,10644.47) v1(24395.53,10644.47) ; 74LS192.13@24350,11700 24470,11820 TCD2.1@24620,11820
  Bottom Layer w12: U2_IN.4@18850,11470 18930,11390 v1(18930,10870) ; v1(21560,10870) 74LS08.5@21560,11120 ; v1(21900,11030) 21904.47,11025.53 21904.47,9884.47 21950,9838.94 74LS123.9@21950,9830 ; v1@21904.47,10640 v1(21908.94,10644.47) ; 74LS192.13@24350,11700 24350,11491.06 24395.53,11445.53 24395.53,11214.47 v1(24395.53,10644.47)
TCU1_COUNT: U1_SCORE.5 U2_SCORE.12 | length 3078.3
  Top Layer w15: v1(17210,10830) v1(18700,10830) ; v1(18250,11520) v1(18700,11520)
  Bottom Layer w15: v1(17210,10830) 17210,10960 U1_SCORE.5@17370,11120 ; U2_SCORE.12@18250,11430 v1(18250,11520) ; v1(18700,10830) 18697.5,10832.5 18697.5,11517.5 v1(18700,11520)
VCC: 0.1u.1@17890,10670 0.1u.1@24670,10510 0.1u.2@16730,11350 0.1u.2@17200,9460 0.1u.2@18470,13170 0.1u.2@22700,13280 0.1u.2@22790,12210 5.1k.1@17360,9460 5.1k.1@19130,9460 5.1k.1@19320,9460 5.1k.1@19920,9460 5.1k.1@20560,9460 5.1K.2 5.1k.2@16750,10480 5.1k.2@17580,14090 5.1k.2@18630,10480 74LS00.14 74LS08.14 74LS20.14 74LS74.4 74LS74.14 74LS123.2@23780,10390 74LS123.3@21650,10330 74LS123.3@23780,10290 74LS123.10@21950,9930 74LS123.10@24080,9890 74LS123.11@21950,10030 74LS123.11@24080,9990 74LS123.16 74LS192.5 74LS192.16 100.2 100K.2 150K.1 470u.1 510.1@19130,9670 510.1@19330,9670 4060.16 4511.3 4511.4 4511.16 GRE.1@17430,14330 LED2_INR.1 LED3_INR.1 LED4_INR.1 LED5_INR.1 LED6_INR.1 LED7_INR.1 LED8_INR.1 LED10_ING.1 LED11_ING.1 LED12_ING.1 LED13_ING.1 LED14_ING.1 LED15_ING.1 LED16_ING.1 POWER.2 R1_IN.2 R2_IN.2 R2_TIME.2 R3_IN.2 R3_TIME.2 R4_IN.2 R4_TIME.2 R5_IN.2 R5_TIME.2 R6_IN.2 R6_SCORE.2 R6_TIME.2 R7_IN.2 R7_SCORE.2 R7_TIME.2 R8_SCORE.2 R9_SCORE.2 R10_SCORE.2 R11_SCORE.2 RED.1@17300,14330 U1_CONTROL.14 U1_IN.14 U1_SCORE.16 U2_CONTROL.14 U2_IN.10 U2_IN.14 U2_SCORE.16 U3_CONTROL.14 U3_IN.20 U4_IN.16 U4_SCORE.3 U4_SCORE.4 U4_SCORE.16 U5_IN.11 U5_IN.20 U5_SCORE.3 U5_SCORE.4 U5_SCORE.16 U6_IN.11 U6_IN.20 U7_IN.5 U8_IN.3 U8_IN.16 U9_IN.14 | length 89062.3
  Top Layer w12: 0.1u.2@17200,9460 5.1k.1@17360,9460
  Top Layer w15: 16490,11420 U1_SCORE.16@16970,11420 16900,11350 0.1u.2@16730,11350 ; 16490,11920 U4_SCORE.16@16970,11920 ; v1(16850,11700) 17090,11700 U4_SCORE.3@17170,11620 U4_SCORE.4@17270,11620 ; RED.1@17300,14330 GRE.1@17430,14330 ; 17580,13910 5.1k.2@17580,14090 ; v1(17760,11430) U2_SCORE.16@17850,11430 ; v1(17760,11920) U5_SCORE.16@17850,11920 ; U5_SCORE.3@18050,11620 U5_SCORE.4@18150,11620 ; LED2_INR.1@18210,14380 LED10_ING.1@18350,14380 ; v1@18490,13910 R7_IN.2@18490,14080 ; U1_CONTROL.14@18980,10620 18980,10750 ; LED3_INR.1@19080,14370 LED11_ING.1@19210,14370 ; v1@19100,10750 v1(19102.97,10752.97) ; 19130,8490 v1(19130,8610) ; v1(19130,9350) v1(20560,9350) ; 510.1@19130,9670 510.1@19330,9670 ; 19290,13910 19292.97,13907.03 ; 19292.97,13902.97 19300,13910 ; 19350,13910 R6_IN.2@19350,14050 ; v1(19387.03,13907.03) v1@19390,13910 ; v1@19830,13910 v1(19832.97,13907.03) ; LED4_INR.1@19960,14350 LED12_ING.1@20100,14350 ; 20220,13910 R5_IN.2@20220,14050 ; v1(20312.97,13902.97) v1@20320,13910 ; U9_IN.14@20820,11760 21070,11760 74LS74.14@21160,11850 ; LED5_INR.1@20860,14360 LED13_ING.1@21000,14360 ; U2_CONTROL.14@21080,10380 21130,10330 150K.1@21260,10330 74LS123.3@21650,10330 ; v1(21130,13900) v1@21140,13910 ; v1@21130,13910 R4_IN.2@21130,14050 ; 74LS08.14@21160,11420 21193.49,11420 21240.52,11467.03 21377.03,11467.03 74LS74.4@21460,11550 ; LED6_INR.1@21800,14350 LED14_ING.1@21940,14350 ; 74LS123.11@21950,10030 100K.2@22360,10030 22367.03,10037.03 23152.97,10037.03 100K.2@23200,9990 ; 22070,13910 22080,13920 R3_IN.2@22080,14060 ; LED7_INR.1@22710,14340 22860,14340 LED15_ING.1@22870,14330 ; 74LS00.14@22830,9540 22877.03,9492.97 23232.97,9492.97 74LS00.14@23280,9540 100.2@23520,9540 ; v1(23000,12000) 23120,12000 4511.3@23200,11920 4511.4@23300,11920 ; 100K.2@23400,10290 74LS123.3@23780,10290 ; LED8_INR.1@23690,14340 LED16_ING.1@23860,14340 ; v1(23930,11260) 24310,11260 74LS192.5@24450,11400 ; v1(23930,11700) 74LS192.16@24050,11700 ; 74LS123.11@24080,9990 100K.2@24470,9990 ; 4511.3@24100,11920 4511.4@24200,11920
  Top Layer w20: 23020,13910 R2_IN.2@23020,14080 ; 23960,13910 R1_IN.2@23960,14100
  Top Layer w40: 16490,9420 470u.1@16840,9420 17160,9420 0.1u.2@17200,9460 ; 16490,10740 16500,10750 24890,10750 ; 16490,13910 24890,13910 ; POWER.2@17090,8930 17090,8490 ; 17090,8490 16590,8490 16490,8590 16490,10850 16490,15130 16640,15280 24770,15280 24890,15160 24890,13910 ; 17090,8490 24790,8490 24890,8590 24890,10750 ; 24890,10750 24890,13910
  Bottom Layer w15: R9_SCORE.2@16750,10180 R10_SCORE.2@16750,10280 R11_SCORE.2@16750,10380 5.1k.2@16750,10480 v1(16750,10750) ; v1(16850,11700) 16850,11540 U1_SCORE.16@16970,11420 ; GRE.1@17430,14330 17430,14240 5.1k.2@17580,14090 ; v1(17760,10750) v1(17760,11920) ; 0.1u.1@17890,10670 17800,10760 17800,11380 U2_SCORE.16@17850,11430 17802.97,11477.03 17802.97,11656.78 17813.22,11667.03 18002.97,11667.03 U5_SCORE.3@18050,11620 ; LED10_ING.1@18350,14380 18350,14150 18420,14080 R7_IN.2@18490,14080 ; 0.1u.2@18470,13170 v1(18470,13910) ; R8_SCORE.2@18630,10180 R7_SCORE.2@18630,10280 R6_SCORE.2@18630,10380 5.1k.2@18630,10480 v1(18630,10750) ; U3_IN.20@19030,13650 v1(19030,13910) ; v1(19102.97,10752.97) 19102.97,11322.97 U2_IN.10@19150,11370 19102.97,11417.03 19102.97,11722.97 U2_IN.14@19150,11770 ; v1(19130,8610) v1(19130,9350) 5.1k.1@19130,9460 510.1@19130,9670 ; LED11_ING.1@19210,14370 19210,14140 19300,14050 R6_IN.2@19350,14050 ; v1(19320,9350) 5.1k.1@19320,9460 ; v1(19387.03,13907.03) 19387.03,12812.97 U4_IN.16@19340,12765.94 ; v1(19680,10750) U5_IN.11@19680,11120 19631.5,11168.5 19631.5,11940.09 19680,11988.59 U5_IN.20@19680,12020 ; v1(19832.97,13907.03) 19832.97,12852.97 19880,12805.95 U1_IN.14@19880,12800 ; v1(19920,9350) 5.1k.1@19920,9460 ; LED12_ING.1@20100,14350 20100,14130 20180,14050 R5_IN.2@20220,14050 ; v1(20250,10750) U6_IN.11@20250,11120 20250,11130 20201.5,11178.5 20201.5,11968.5 20250,12017 U6_IN.20@20250,12020 ; v1(20312.97,13902.97) 20312.97,13112.97 20360,13065.95 U7_IN.5@20360,13060 ; U3_CONTROL.14@20450,10380 v1(20450,10750) ; v1(20560,9350) 5.1k.1@20560,9460 ; U8_IN.3@20830,13260 20930,13260 U8_IN.16@21130,13460 v1(21130,13900) ; LED13_ING.1@21000,14360 21000,14150 21100,14050 R4_IN.2@21130,14050 ; U2_CONTROL.14@21080,10380 v1(21080,10750) v1(21080,11760) ; 21080,11420 74LS08.14@21160,11420 ; LED14_ING.1@21940,14350 21940,14140 22020,14060 R3_IN.2@22080,14060 ; 74LS123.10@21950,9930 74LS123.11@21950,10030 21997.03,10077.03 21997.03,10472.97 21950,10520 74LS123.16@21950,10530 21951.44,10531.44 21951.44,10748.56 v1(21950,10750) 21950,11230 4060.16@22090,11370 ; 0.1u.2@22700,13280 v1(22700,13910) ; 0.1u.2@22790,12210 22790,11960.06 22950,11800.06 22950,11800 ; 74LS123.16@22820,10490 22910,10580 v1(22910,10750) ; LED15_ING.1@22870,14330 22870,14170 22960,14080 R2_IN.2@23020,14080 ; 5.1K.2@22910,10860 R4_TIME.2@22910,11150 22910,11580 74LS192.16@23040,11710 22950,11800 ; 23000,12040 v1(23000,12000) 23000,12120 4511.16@23000,12220 22950,12170 22950,11800 ; 100K.2@23200,9990 23280,9910 74LS00.14@23280,9540 ; 100K.2@23400,10290 23390,10300 v1(23390,10750) 23390,11360 74LS192.5@23440,11410 ; 74LS123.3@23780,10290 74LS123.2@23780,10390 ; LED16_ING.1@23860,14340 23860,14200 R1_IN.2@23960,14100 ; 4511.16@23900,12220 23900,12120 4511.3@24100,11920 24100,11750 74LS192.16@24050,11700 ; v1(23930,10750) 23930,10870 23930,11160 23930,11580 v1(23930,11700) ; 74LS123.10@24080,9890 74LS123.11@24080,9990 24032.97,10037.03 24032.97,10442.97 74LS123.16@24080,10490 v1(24080,10750) ; 74LS192.5@24450,11400 24550,11300 24550,10630 0.1u.1@24670,10510 ; 100K.2@24470,9990 24550,9990 24590,9950 24590,9870 74LS20.14@24590,9530 ; U4_IN.16@19340,12765.95 U4_IN.16@19340,12760 U4_IN.16@19340,12765.94
  Bottom Layer w20: v1(22910,10750) 5.1K.2@22910,10860
pads on no net: 74LS08.8 74LS08.9 74LS08.10 74LS08.11 74LS08.12 74LS08.13 74LS20.3 74LS20.8 74LS20.9 74LS20.10 74LS20.11 74LS20.12 74LS20.13 74LS74.8 74LS74.9 74LS74.10 74LS74.11 74LS74.12 74LS74.13 74LS123.4 74LS123.5@22520,10090 74LS123.6@22520,9990 74LS123.7@22520,9890 74LS123.9@22820,9790 74LS123.10@22820,9890 74LS123.11@22820,9990 74LS123.12 74LS192.12 4060.4 4060.5 4060.6 4060.9 4060.13 4060.14 4060.15 "TEAM NUM..8" "TEAM NUM..10" DS1_TIME.10 DS2_SCORE.8 DS2_SCORE.10 SCORE.8 SCORE.10 TIME.10 U1_CONTROL.8 U1_CONTROL.9 U1_CONTROL.10 U1_CONTROL.11 U1_CONTROL.12 U1_CONTROL.13 U1_IN.1 U1_IN.3 U1_IN.5 U1_IN.8 U1_IN.9 U1_IN.10 U1_IN.11 U1_IN.12 U1_IN.13 U1_SCORE.12 U1_SCORE.13 U2_CONTROL.8 U2_CONTROL.9 U2_CONTROL.10 U2_CONTROL.11 U2_CONTROL.12 U2_CONTROL.13 U2_IN.11 U2_IN.12 U2_IN.13 U4_IN.6 U4_IN.7 U4_IN.9 U4_IN.15 U7_IN.1 U7_IN.14 U9_IN.1 U9_IN.6 U9_IN.8

## Silkscreen, mask and mechanical layers (free items; w line width, h text height)
Top Overlay:
  text "竞" at 24340,15030 h300
  text "赛" at 24340,14790 h300
  text "抢" at 24340,14530 h300
  text "答" at 24340,14280 h300
  text "器" at 24340,14040 h300
  text "Group 19_3170105582" at 19410,12310 h150